# Altium PCB SIC18102  V1 8电极6005_20180920.PcbDoc (part 1 of 3)
Units mm, origin at the board's own origin, x right, y up, seen from the top; angles counter-clockwise.
Board outline 116 x 63 mm, 2 copper layers (Top Layer, Bottom Layer); 179 components, 127 nets, 387 pads, 294 vias.
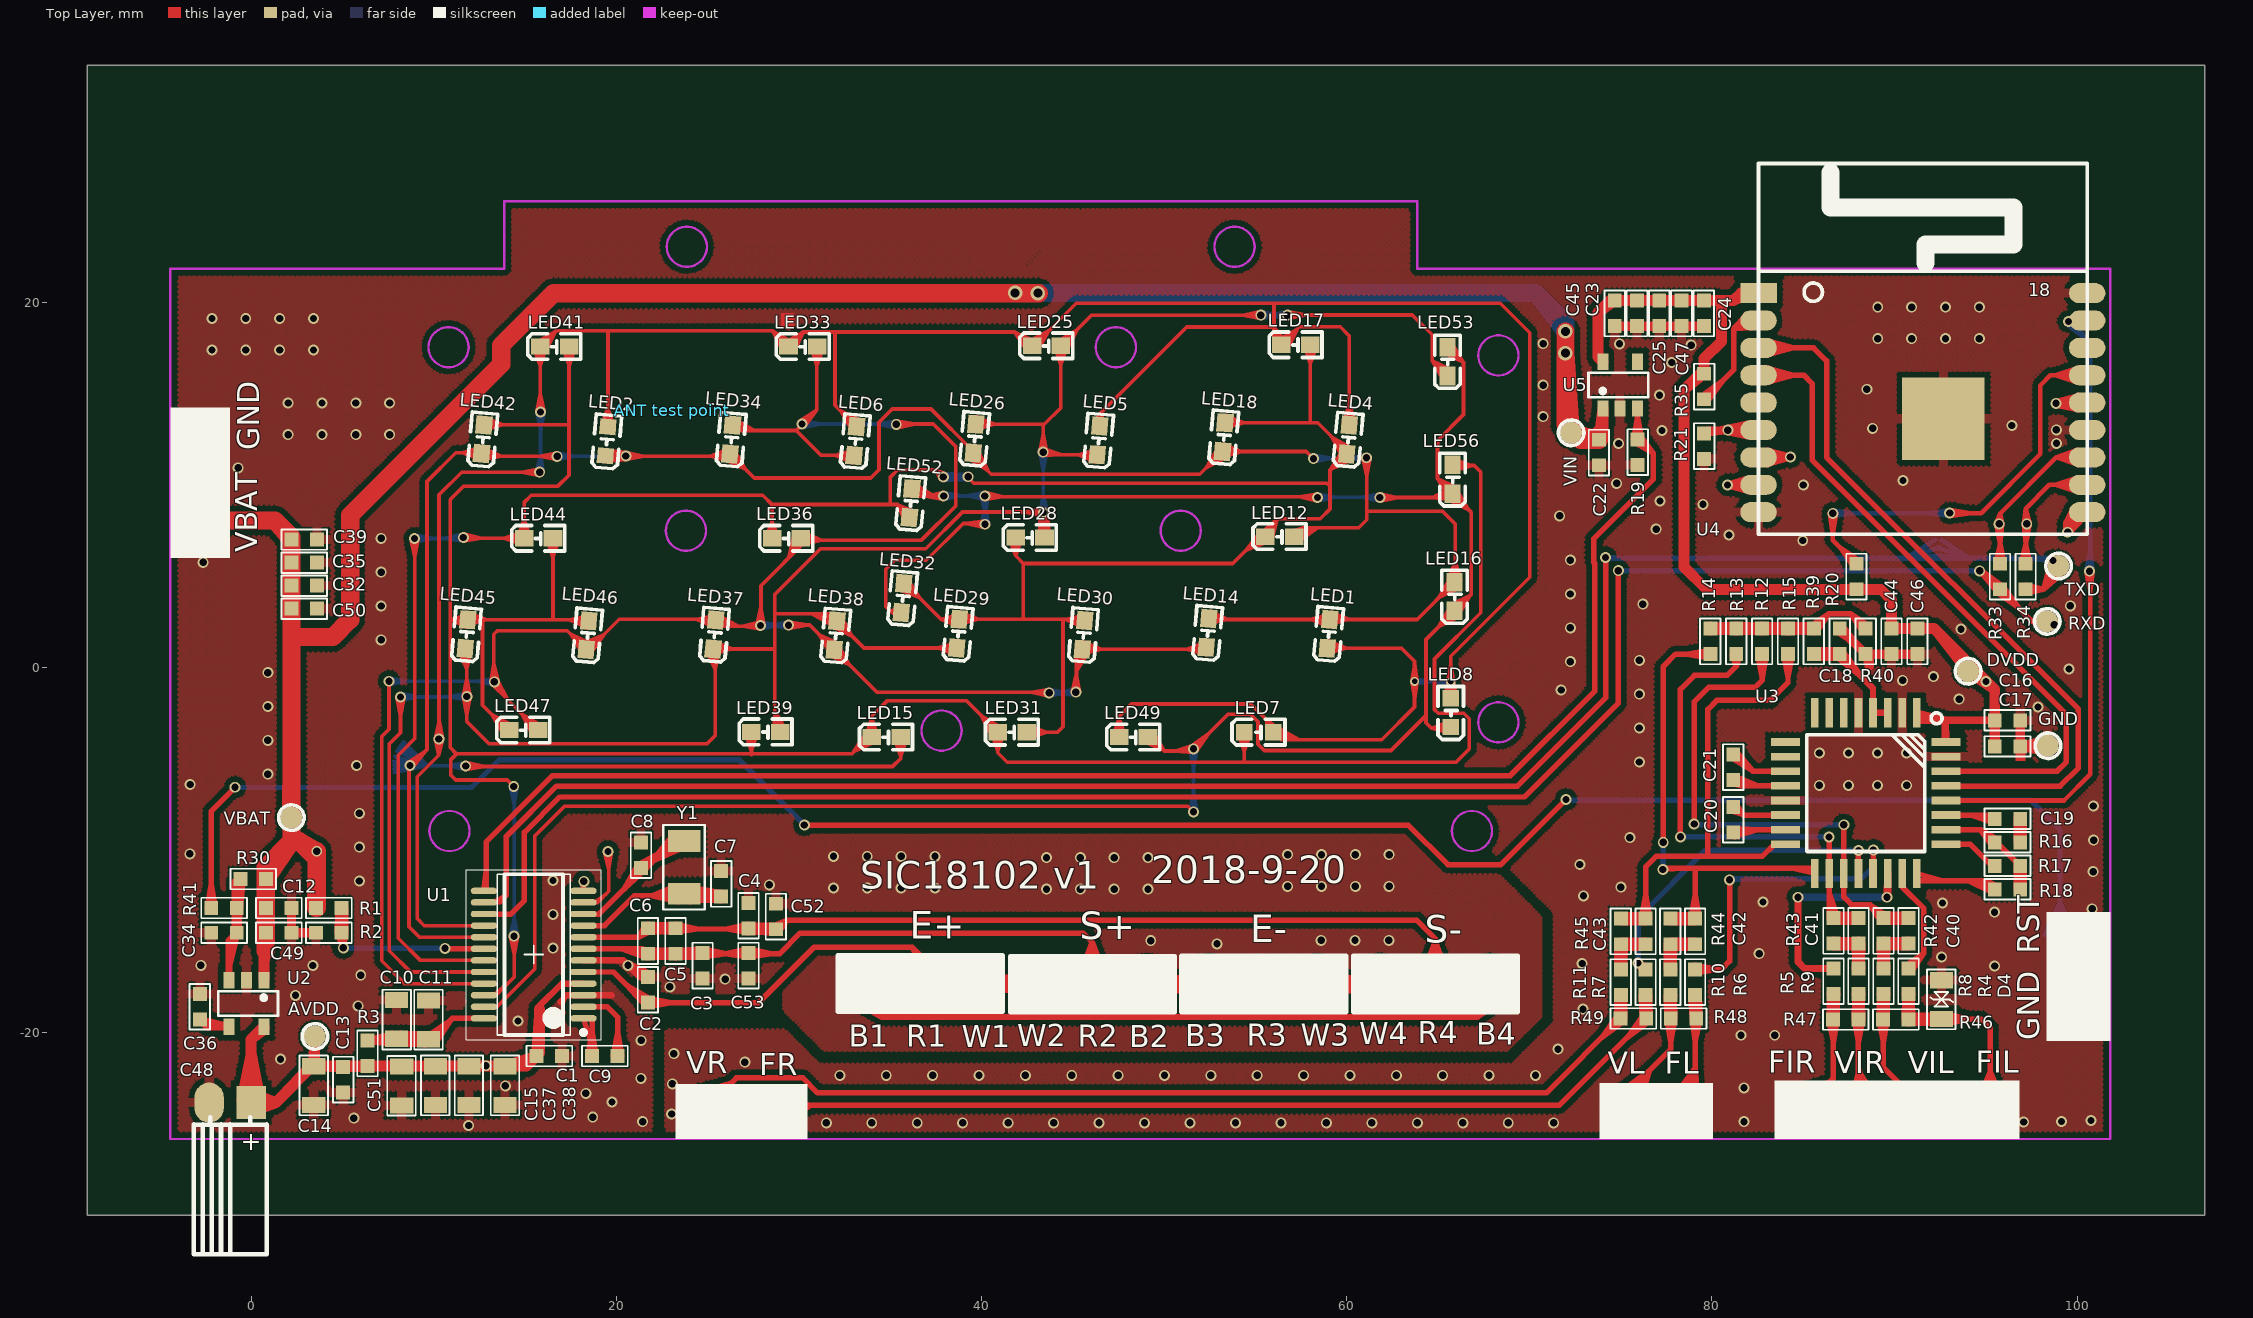
[diagram p0: Top Layer view]
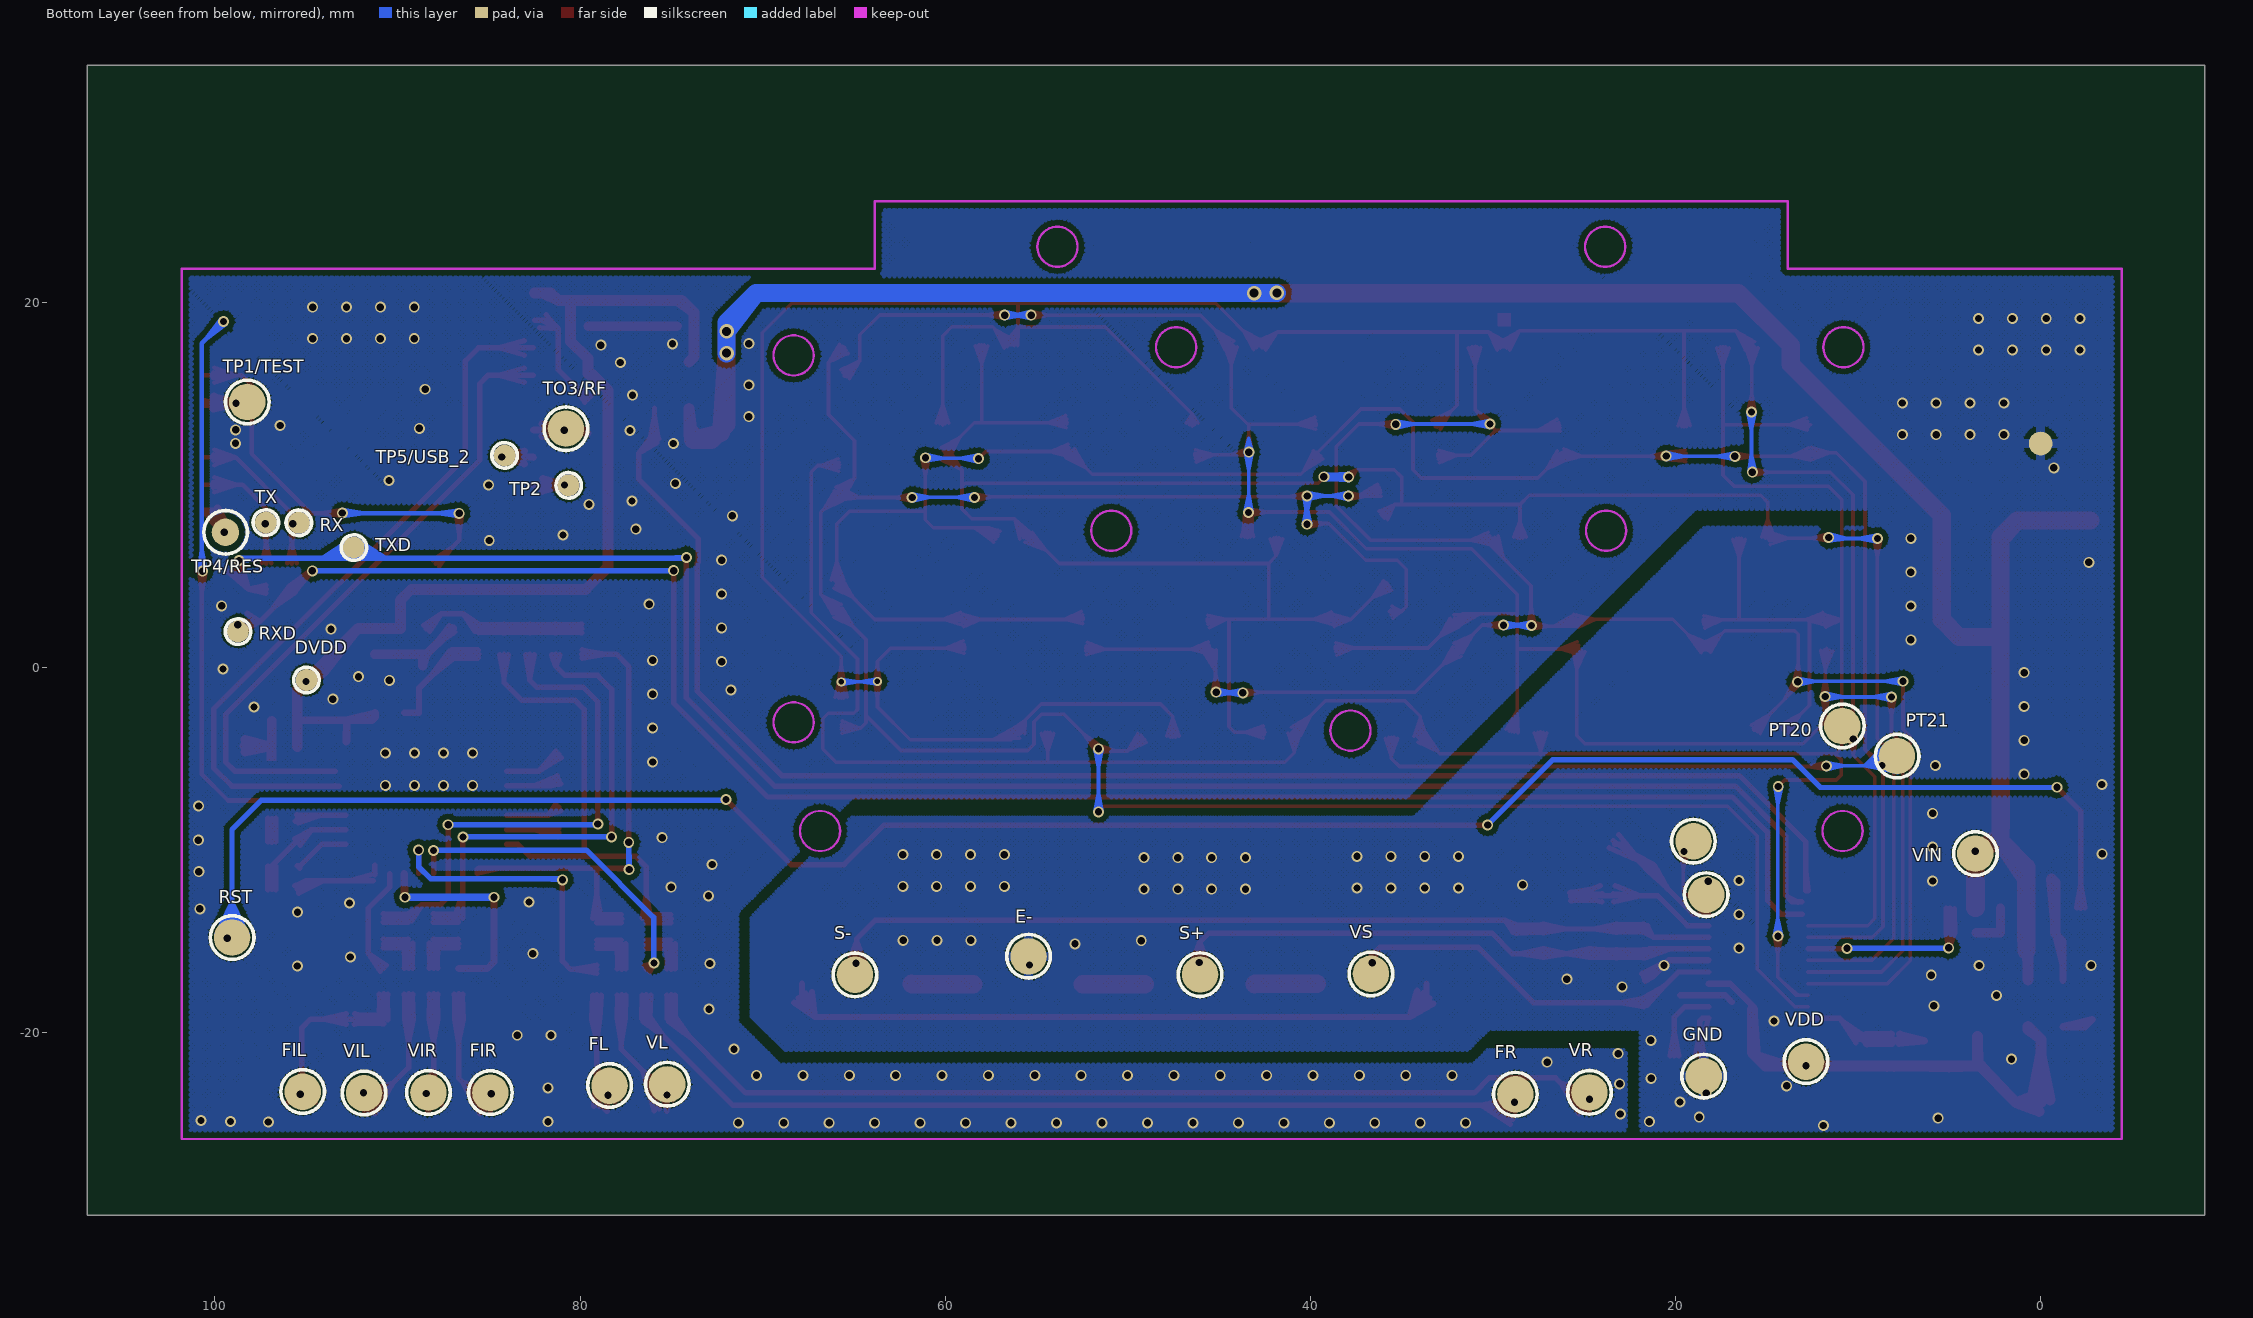
[diagram p1: Bottom Layer view, seen from below]

## Layer stack, top to bottom
Top Solder: solder mask 0.0102, Solder Resist, Dk 3.5
Top Layer: signal copper 0.0356
Dielectric1: core 0.32, FR-4, Dk 4.8
Bottom Layer: signal copper 0.0356
Bottom Solder: solder mask 0.0102, Solder Resist, Dk 3.5

## Board outline
-9,33 107,33 107,-30 -9,-30 -9,33

## Design rules (kind name [scope] priority, off if disabled: settings)
Clearance Clearance_1 [(InPolygon)] p1: gap=0.3 ignorepadtopadclearanceinfootprint=FALSE except(0: Arc-Hole Track-Hole SMDPad-Hole THPad-Hole Via-Hole Fill-Hole Poly-Hole Region-Hole Text-Hole)
Clearance [All] p2: gap=0.2 ignorepadtopadclearanceinfootprint=FALSE except(0: Arc-Hole Track-Hole SMDPad-Hole THPad-Hole Via-Hole Fill-Hole Poly-Hole Region-Hole Text-Hole)
ComponentClearance [All] p1: gap=0 collisioncheckmode=3 verticalgap=0.254 showdistances=FALSE
FabricationTestpoint [(IsPad And (OnTopLayer Or OnBottomLayer))] p1 off: side=3 testpointundercomponent=TRUE minsize=1.016 maxsize=2.54 preferedsize=1.524 minholesize=0 maxholesize=1.016 preferedholesize=0.813 testpointgrid=0.025 allowsidetop=TRUE allowsidebottom=TRUE usegrid=TRUE gridtolerance=0
PolygonConnect PolygonConnect_1 [IsVia] p1: connectstyle=Direct reliefconductorwidth=0.254 reliefentries=4 polygonreliefangle="90 Angle" airgapwidth=0.254
PolygonConnect [All] p2: connectstyle=Relief reliefconductorwidth=0.5 reliefentries=4 polygonreliefangle="90 Angle" airgapwidth=0.254
RoutingLayers [All] p1: top layer_v5=FALSE bottom layer_v5=FALSE
RoutingVias [All] p1: holewidth=0.711 width=1.27 viastyle="Through Hole" minholewidth=0.2 minwidth=0.3 maxholewidth=0.9 maxwidth=1.27
SilkToSolderMaskClearance SilkscreenOverComponentPads [IsPad] p1: minsilkscreentomaskgap=0.254 clearancetoexposedcopper=TRUE
SolderMaskExpansion [All] p1: expansion=0.102
Width [All] p1: maxlimit=2.54 minlimit=0.1 preferedwidth=0.5
26 further rules are at their usual default settings.

## Classes and differential pairs
component class M97_Flash_SCH: "ANT test point" C1 C2 C3 C4 C5 C6 C7 C8 C10 C11 C12 C13 C14 C15 C16 C17 C19 C21 C22 C23 C24 C25 C33 DGND GPIO4 "GPIO_5 WakeUP" H0 H1 ICE J2 L2 LED1 LED2 LED4 LED5 LED6 LED7 LED8 LED9 LED10 LED11 LED12 LED13 LED14 LED15 LED16 LED17 LED18 LED25 LED26 LED28 LED29 LED30 LED31 LED33 LED34 LED36 LED37 LED38 LED39 LED41 LED42 LED44 LED45 LED46 LED47 LED49 LED52 LED53 LED54 LED55 LED56 PT20 PT21 PT23 PT24 PT25 PT26 PT27 R1 R2 R3 RST SCAN U3 U4 VDD VPP0 Y1

## Components (designator, comment, footprint, x,y, rotation, side; value= is the part's Value field where it differs from the comment)
"ANT test point" "" TEST_POINT 23.044,14.08 r90 top
AVDD "" "TEST-SMD 1.2" 3.47,-20.2 r270 top
C1 "104" C0603E 15.625,-21.274 r0 top
C2 "105" C0603E 21.718,-16.946 r270 top
C3 "152" C0603E 24.714,-17.026 r90 top
C4 "152" C0603E 27.23,-12.893 r270 top
C5 "103" C0603E 23.23,-14.279 r270 top
C6 "152" C0603E 21.718,-14.279 r270 top
C7 "25P" C0603E 25.73,-11.15 r270 top
C8 "25P" C0603E 21.34,-9.58 r270 top
C9 "105" C0603E 18.664,-21.274 r0 top
C10 "106" C0805E 7.95,-18.202 r270 top
C11 "106" C0805E 9.71,-20.36 r90 top
C12 "105" C0603E 2.203,-13.172 r180 top
C13 "104" C0603E 5.03,-23.27 r90 top
C14 "106" C0805E 3.42,-23.963 r90 top
C15 "106" C0805E 10.08,-23.964 r90 top
C16 "106" C0603E 95.486,-2.892 r0 top
C17 "104" C0603E 96.883,-4.32 r180 top
C18 "105" C0603E 86.998,0.732 r90 top
C19 "105" C0603E 96.883,-8.284 r180 top
C20 "105" C0603E 81.166,-7.639 r270 top
C21 "104" C0603E 81.166,-4.754 r270 top
C22 "105" C0603E 73.805,11.079 r90 top
C23 "106" C0603E 75.893,18.696 r90 top
C24 "104" C0603E 79.553,18.696 r90 top
C25 "106" C0603E 77.113,20.093 r270 top
C32 "106" C0603E 3.592,4.485 r180 top
C34 "1.5nF" C0603E -2.196,-14.526 r0 top
C35 "152" C0603E 3.592,5.747 r180 top
C36 "NC" C0603E -2.82,-17.88 r270 top
C37 "106" C0805E 11.925,-23.964 r90 top
C38 "106" C0805E 13.898,-23.964 r90 top
C39 "104" C0603E 3.592,7.008 r180 top
C40 "473" C0603E 90.762,-13.725 r270 top
C41 "473" C0603E 88.023,-13.725 r270 top
C42 "473" C0603E 79.073,-13.756 r270 top
C43 "473" C0603E 76.362,-13.756 r270 top
C44 "106" C0603E 89.834,0.732 r90 top
C45 "106" C0603E 74.673,18.696 r90 top
C46 "106" C0603E 91.252,0.732 r90 top
C47 "106" C0603E 78.333,18.696 r90 top
C48 "NC" "C 4X7" -1.16,-23.83 r0 top
C49 "152" C0603E 2.203,-14.526 r180 top
C50 "NC" C0603E 3.592,3.224 r180 top
C51 "106" C0805E 8.234,-23.983 r90 top
C52 "104" C0603E 28.729,-14.335 r90 top
C53 "104" C0603E 27.23,-15.629 r270 top
D4 "NC" TVS0805 92.57,-19.25 r90 top
DVDD "" "TEST-SMD 1.2" 94.97,-0.68 r90 bottom
DVDD "" "TEST-SMD 1.2" 94.02,-0.2 r270 top
E- "" TEST-SMD#1 55.43,-15.82 r180 bottom
FIL "" TEST-SMD#1 95.19,-23.23 r180 bottom
FIL "" TEST-SMD#2 95.24,-24.304 r0 top
FIR "" TEST-SMD#1 84.91,-23.29 r180 bottom
FIR "" TEST-SMD#2 84.91,-24.304 r0 top
FL "" TEST-SMD#1 78.38,-22.9 r180 bottom
FL "" TEST-SMD#2 78.508,-24.304 r0 top
FR "" TEST-SMD#1 28.77,-23.376 r180 bottom
FR "" TEST-SMD#2 28.77,-24.304 r0 top
GND "" TEST-SMD#1 18.45,-22.38 r90 bottom
GND "" "TEST-SMD 1.2" 98.39,-4.28 r270 top
GND "" TEST-SMD#2 -2.71,12.61 r90 top
GND "" TEST-SMD#2 100.13,-18.96 r90 top
LED1 "LED5" LED0603#1 59.068,2.636 r265 top
LED2 "LED2" LED0603#2 19.53,13.18 r265 top
LED4 "LED2" LED0603#1 60.138,13.276 r265 top
LED5 "LED2" LED0603#1 46.47,13.23 r265 top
LED6 "LED2" LED0603#1 33.148,13.196 r265 top
LED7 "LED2" LED0603#3 55.97,-3.54 r180 top
LED8 "LED2" LED0603#2 65.695,-1.68 r270 top
LED12 "LED2" LED0603#1 57.12,7.17 r180 top
LED14 "LED2" LED0603#1 52.44,2.69 r265 top
LED15 "LED2" LED0603#1 35.562,-3.81 r180 top
LED16 "LED4" LED0603#1 65.899,4.684 r270 top
LED17 "LED2" LED0603#1 58,17.68 r180 top
LED18 "LED2" LED0603#1 53.328,13.406 r265 top
LED25 "LED2" LED0603#1 44.34,17.62 r180 top
LED26 "LED2" LED0603#1 39.678,13.326 r265 top
LED28 "LED2" LED0603#1 43.442,7.12 r180 top
LED29 "LED6" LED0603#1 38.778,2.646 r265 top
LED30 "LED2" LED0603#1 45.64,2.58 r265 top
LED31 "LED2" LED0603#1 42.462,-3.54 r180 top
LED32 "LED2" LED0603#1 35.738,4.596 r265 top
LED33 "LED2" LED0603#1 31.002,17.58 r180 top
LED34 "LED2" LED0603#1 26.35,13.28 r265 top
LED36 "LED2" LED0603#1 30.1,7.08 r180 top
LED37 "LED2" LED0603#1 25.428,2.596 r265 top
LED38 "LED2" LED0603#1 32.07,2.55 r265 top
LED39 "LED2" LED0603#1 28.972,-3.524 r180 top
LED41 "LED2" LED0603#1 17.4,17.58 r180 top
LED42 "LED2" LED0603#1 12.74,13.29 r265 top
LED44 "LED2" LED0603#1 16.52,7.08 r180 top
LED45 "LED6" LED0603#1 11.848,2.616 r265 top
LED46 "LED2" LED0603#1 18.48,2.56 r265 top
LED47 "LED2" LED0603#1 15.702,-3.42 r180 top
LED49 "LED2" LED0603#1 49.11,-3.81 r180 top
LED52 "LED2" LED0603#1 36.178,9.796 r265 top
LED53 "LED6" LED0603#1 65.51,17.552 r270 top
LED56 "LED2" LED0603#1 65.79,11.1 r270 top
PT20 "" TEST-SMD#1 10.87,-3.2 r270 bottom
PT21 "" TEST-SMD#1 7.87,-4.85 r270 bottom
R1 "1M" R0603E 4.947,-13.172 r180 top
R2 "1M" R0603E 3.55,-14.526 r0 top
R3 "NC" R0603E 6.36,-20.433 r270 top
R4 "330R" R0603E 90.762,-16.481 r270 top
R5 "330R" R0603E 86.654,-16.481 r270 top
R6 "330R" R0603E 79.073,-16.527 r270 top
R7 "330R" R0603E 76.362,-16.527 r270 top
R8 "330R" R0603E 89.393,-16.481 r270 top
R9 "330R" R0603E 88.023,-16.481 r270 top
R10 "330R" R0603E 77.718,-16.527 r270 top
R11 "330R" R0603E 75.007,-17.924 r90 top
R12 "1M" R0603E 82.744,0.732 r90 top
R13 "1M" R0603E 81.327,0.732 r90 top
R14 "1M" R0603E 79.909,0.732 r90 top
R15 "1M" R0603E 84.162,0.732 r90 top
R16 "1K" R0603E 95.486,-9.571 r0 top
R17 "300R" R0603E 96.883,-10.858 r180 top
R18 "1K" R0603E 95.486,-12.145 r0 top
R19 "100K" R0603E 75.93,11.103 r90 top
R20 "10K" R0603E 87.91,5.683 r270 top
R21 "10K" R0603E 79.57,11.433 r90 top
R30 "100K" R0603E 0.801,-11.58 r180 top
R33 "0R" R0603E 95.778,5.683 r270 top
R34 "0R" R0603E 97.175,4.286 r90 top
R35 "1K" R0603E 79.57,16.09 r270 top
R39 "10K" R0603E 85.58,0.732 r90 top
R40 "10K" R0603E 88.416,2.129 r270 top
R41 "2K" R0603E -2.196,-13.172 r0 top
R42 "10M" R0603E 89.393,-15.122 r90 top
R43 "10M" R0603E 86.654,-15.122 r90 top
R44 "10M" R0603E 77.718,-15.153 r90 top
R45 "10M" R0603E 75.007,-15.153 r90 top
R46 "NC" R0603E 89.372,-19.275 r0 top
R47 "NC" R0603E 88.026,-19.275 r180 top
R48 "NC" R0603E 77.743,-19.219 r0 top
R49 "NC" R0603E 75,-19.219 r0 top
RST "" TEST-SMD#1 99.06,-14.79 r270 bottom
RST "" TEST-SMD#2 100.13,-14.86 r270 top
RX "" "TEST-SMD 1.2" 95.39,7.93 r90 bottom
RXD "" "TEST-SMD 1.2" 98.74,1.97 r270 bottom
RXD "" "TEST-SMD 1.2" 98.35,2.53 r270 top
S+ "" TEST-SMD#1 46.04,-16.81 r0 bottom
S- "" TEST-SMD#1 64.94,-16.82 r0 bottom
TO3/RF "" TEST-SMD#1 80.77,13.09 r0 bottom
TP1/TEST "" TEST-SMD#1 98.23,14.55 r270 bottom
TP2 "" "TEST-SMD 1.2" 80.63,9.98 r270 bottom
TP4/RES "" TEST-SMD#3 99.42,7.41 r270 bottom
TP5/USB_2 "" "TEST-SMD 1.2" 84.13,11.61 r180 bottom
TX "" "TEST-SMD 1.2" 97.2,7.94 r90 bottom
TXD "" "TEST-SMD 1.2" 92.39,6.57 r270 bottom
TXD "" "TEST-SMD 1.2" 98.97,5.56 r270 top
U1 "CSU18MB86-24" SSOP-24P 18.19,-19.215 r90 top
U2 "HT7233" SOT-23-5 0.68,-17.12 r270 top
U3 "CS1258" LQFP32 91.22,-2.48 r270 top locked
U4 "CSM64F02" ESP-WROOM-02 100.55,7.31 r0 top locked
U5 "RT9013" SOT-23-5 74.02,14.19 r90 top
VBAT "" "TEST-SMD 1.2" 2.18,-8.22 r270 top
VBAT "" TEST-SMD#2 -2.71,8.058 r90 top
VDD "" TEST-SMD#1 12.85,-21.59 r180 bottom
VIL "" TEST-SMD#1 91.83,-23.31 r180 bottom
VIL "" TEST-SMD#2 91.797,-24.304 r0 top
VIN "" TEST-SMD#1 3.58,-10.19 r270 bottom
VIN "" "TEST-SMD 1.2" 72.28,12.86 r270 top
VIR "" TEST-SMD#1 88.3,-23.28 r180 bottom
VIR "" TEST-SMD#2 88.353,-24.304 r0 top
VL "" TEST-SMD#1 75.22,-22.83 r180 bottom
VL "" TEST-SMD#2 75.256,-24.304 r0 top
VR "" TEST-SMD#1 24.71,-23.274 r180 bottom
VR "" TEST-SMD#2 24.73,-24.304 r0 top
VS "" TEST-SMD#1 36.68,-16.77 r0 bottom
Y1 "32.768KHz" 3215(32.768) 23.71,-10.94 r90 top
? "" TEST-SMD#1 18.31,-12.44 r90 bottom
? "" TEST-SMD#1 19.01,-9.51 r90 bottom
? "" SENSOR 39.638,-17.314 r180 top
? "" SENSOR 43.059,-17.34 r0 top
? "" SENSOR 61.84,-17.314 r0 top
? "" SENSOR 58.459,-17.34 r180 top

## Footprints (in the part's own frame and the unit in brackets; to place one, negate y for a bottom-side part, rotate by r counter-clockwise, add the part's x,y. Pads: shape width x height; smd on the part's side, far side on the other; paste and mask are expansions set on the pad)
3215(32.768) [mm]
  rect 1.2x1.8 smd: 1(1.45,0) 2(-1.45,0)
  silkscreen extent -2.31,-1.13 2.32,1.15
C0603E [mil]
  rect 30x30 smd: 1(0,0) 2(55,0)
  silkscreen extent -22,-22 77,22
C0805E [mil]
  rect 35x50 smd: 1(0,0) 2(83.78,0)
  silkscreen extent -22,-30 107,31
"C 4X7" [mm]
  rect 1.6x1.8 smd: 1(1.15,0)
  oval 1.6x2.2 smd: 2(-1.15,0)
  silkscreen extent -2,-8.3 2,-0.8
ESP-WROOM-02 [mm]
  rect 4.5x4.5 smd: 0(-7.88,6.32)
  rect 2x1.1 smd: 1(-18,13.2)
  oval 2x1.1 smd: 2(-18,11.7) 3(-18,10.2) 4(-18,8.7) 5(-18,7.2) 6(-18,5.7) 7(-18,4.2) 8(-18,2.7) 9(-18,1.2) 10(0,1.2) 11(0,2.7) 12(0,4.2) 13(0,5.7) 14(0,7.2) 15(0,8.7) 16(0,10.2) 17(0,11.7) 18(0,13.2)
  silkscreen extent -18,0 0,20.3
LED0603#1 [mil]
  rect 40x35 smd: A(0,0) K(62.27,0)
  silkscreen extent -25,-28 89,27
LED0603#2 [mil]
  rect 34.65x35 smd: A(0,0) K(62.27,0)
  silkscreen extent -25,-28 89,27
LED0603#3 [mil]
  rect 35.43x35 smd: A(0,0) K(62.27,0)
  silkscreen extent -25,-28 89,27
LQFP32 [mm]
  rect 1.6x0.42 smd: 1(0,0) 2(0,-0.8) 3(0,-1.6) 4(0,-2.4) 5(0,-3.2) 6(0,-4) 7(0,-4.8) 8(0,-5.6) 17(8.8,-5.6) 18(8.8,-4.8) 19(8.8,-4) 20(8.8,-3.2) 21(8.8,-2.4) 22(8.8,-1.6) 23(8.8,-0.8) 24(8.8,0)
  rect 0.42x1.6 smd: 9(1.6,-7.2) 10(2.4,-7.2) 11(3.2,-7.2) 12(4,-7.2) 13(4.8,-7.2) 14(5.6,-7.2) 15(6.4,-7.2) 16(7.2,-7.2) 25(7.2,1.6) 26(6.4,1.6) 27(5.6,1.6) 28(4.8,1.6) 29(4,1.6) 30(3.2,1.6) 31(2.4,1.6) 32(1.6,1.6)
  silkscreen extent 0,-6.03 7.59,1.38
R0603E [mil]
  rect 30x30 smd: 1(0,0) 2(55,0)
  silkscreen extent -22,-22 77,22
SENSOR [mm]
  oval 1.5x2.8 smd: 1(0,0) 2(3,0) 3(6,0)
  silkscreen extent -1.5,-1.55 7.52,1.52
SOT-23-5 [mm]
  rect 0.9x0.6 smd: 1(0,0) 2(0,-0.95) 3(0,-1.9) 4(2.55,-1.9) 5(2.55,0)
  silkscreen extent 0.61,-2.49 1.95,0.78
SSOP-24P [mm]
  oval 0.35x1.45 smd: 1(0,0) 2(0.635,0) 3(1.27,0) 4(1.905,0) 5(2.54,0) 6(3.175,0) 7(3.81,0) 8(4.445,0) 9(5.08,0) 10(5.715,0) 11(6.35,0) 12(6.985,0) 13(6.985,5.45) 14(6.35,5.45) 15(5.715,5.45) 16(5.08,5.45) 17(4.445,5.45) 18(3.81,5.45) 19(3.175,5.45) 20(2.54,5.45) 21(1.905,5.45) 22(1.27,5.45) 23(0.635,5.45) 24(0,5.45)
  silkscreen extent -1.16,-0.98 8.14,6.43
TEST-SMD#1 [mm]
  round 2 smd: 1(0,0)
  silkscreen extent -1.19,-1.18 1.19,1.2
TEST-SMD#2 [mm]
  oval 1.8x2.5 smd: 1(0,0)
  silkscreen extent -1.19,-1.18 1.19,1.2
TEST-SMD#3 [mm]
  round 1.5 smd: 1(0,0)
  silkscreen extent -1.19,-1.18 1.19,1.2
"TEST-SMD 1.2" [mm]
  round 1.2 smd: 1(0,0)
  silkscreen extent -0.7,-0.69 0.7,0.71
TEST_POINT [mm]
TVS0805 [mil]
  rect 35x50 smd: 1(0,0) 2(83.78,0)
  silkscreen extent -22,-30 107,31

## Part data
C34 C36: library part CAP
R30 R41: library part Res1, "Resistor"
U2: library part RT9013

## Free pads (board coordinates)
  round 1.3 smd far side: 17(0,12.27)

## Via types
v1: diameter 0.6, hole 0.4, Top Layer to Bottom Layer, 288 vias
v2: diameter 0.8, hole 0.5, Top Layer to Bottom Layer, 4 vias
v3: diameter 0.5, hole 0.3, Top Layer to Bottom Layer, 2 vias

## Nets (pads, with @x,y where several pads share a name; then routed paths per layer and width w, separated by ;. In a path a pad name is that pad's centre, name@x,y a point inside that pad or via, vN(x,y) a via of type N, cw(c..) or ccw(c..) an arc to the next point about the centre after c; other vN are vias at no path point)
1256CS: 
1256SCK: 
AIN0: U3.6
AIN1: U3.7
AIN2: U3.8
AIN3: U3.9
AIN4: U3.10
ATN: R1.1 R2.2 U1.18 | length 40.1
  Top Layer w0.3: R2.2@4.717,-14.545 R1.1@4.729,-13.256 ; R2.2@4.717,-14.505 R1.1@4.949,-13.244 ; R2.2@4.718,-14.5 R1.1@4.98,-13.245 ; R1.1@4.718,-13.199 R2.2@4.98,-14.454 ; R2.2@4.724,-14.467 R1.1@5.166,-13.258 ; R1.1@4.947,-13.172 R2.2@4.98,-14.454 ; 4.98,-14.044 v1(5.04,-15.35) ; R1.1@4.98,-13.172 v1@4.98,-15.24 ; v1@5.12,-15.38 v1@4.98,-15.24 ; R2.2@5.17,-14.467 R1.1@4.729,-13.256 ; R2.2@5.177,-14.545 R1.1@5.166,-13.258 ; R2.2@5.178,-14.511 R1.1@4.98,-13.245 ; R2.2@5.177,-14.506 R1.1@4.949,-13.244 ; R1.1@5.178,-13.187 R2.2@4.98,-14.454 ; 11.115,-15.405 U1.18@12.19,-15.405 ; 11.912,-15.405 v1(10.61,-15.38) 10.635,-15.405 U1.18@12.74,-15.405 ; R1.1@4.729,-13.256 R2.2@4.947,-14.526 ; R2.2@4.947,-14.526 R1.1@4.98,-13.245 ; R2.2@4.947,-14.526 v1@4.98,-15.24 ; R2.2@4.947,-14.526 R1.1@5.166,-13.258 ; R2.2@4.947,-14.526 R1.1@4.949,-13.244 ; R2.2@4.947,-14.526 v1(5.04,-15.35) ; v1@4.98,-15.24 5.176,-14.553 v1(5.04,-15.35) ; v1@4.98,-15.24 4.721,-14.574 v1(5.04,-15.35)
  Bottom Layer w0.3: v1(5.04,-15.35) 6.343,-15.38 ; v1@5.05,-15.38 v1(10.61,-15.38) 9.308,-15.38
bat+: 
BAT-1: 
BAT-2: 
CAP0: 
CAP1: 
CHPV: 
CHPV1: 
CLK: 
CS1258_CS: U3.28 U4.17 | length 44.3
  Top Layer w0.25: U3.28@92.82,-7.28 99.28,-7.28 100.71,-5.85 v1@100.71,5.25 ; U3.28@93.41,-7.28 94.37,-7.28 ; v1@100.506,5.262 100.71,4.127 ; v1(100.68,5.28) 100.71,4.127 ; v1@100.855,5.271 100.71,4.127
  Bottom Layer w0.25: v1@99.415,18.818 100.462,18.018 v1@99.662,19.065 ; v1(99.53,18.95) 100.71,17.77 v1@100.71,5.28 ; v1@100.506,5.298 100.71,6.433 ; v1(100.68,5.28) 100.71,6.433 ; v1@100.855,5.289 100.71,6.433
CS1258_SCL: U3.29 U4.3 | length 44.8
  Top Layer w0.3: U4.3@82.55,17.51 85.57,17.51 86.28,16.8 86.28,11.51 100.07,-2.28 100.07,-5.49 99.07,-6.49 U3.29@93.18,-6.49 ; U4.3@83,17.51 84.45,17.51 ; U4.3@83.055,17.114 84.45,17.51 ; U4.3@83.055,17.906 84.45,17.51 ; U3.29@93.41,-6.48 94.52,-6.49
CS1258_SDA: U3.30 U4.4 | length 41.3
  Top Layer w0.3: U4.4@82.55,16.01 85.03,16.01 85.49,15.55 85.49,11.36 99.41,-2.56 99.41,-5.17 98.9,-5.68 U3.30@93.44,-5.68 ; U4.4@83,16.01 84.45,16.01 ; U4.4@83.055,15.614 84.45,16.01 ; U4.4@83.055,16.406 84.45,16.01 ; U3.30@93.41,-5.68 94.52,-5.68
DVDD: C16.1 C17.2 C23.2 C24.2 C25.1 C44.2 C45.2 C46.2 C47.2 DVDD.1 R20.2 R35.1 U3.1 U3.32 U4.1 U5.5 | length 79.2
  Top Layer w0.4: U3.32@92.76,-4.02 U3.32@92.82,-4.08 ; 92.977,-2.892 U3.1@91.22,-2.48 91.22,-2.73 91.382,-2.892 C16.1@95.486,-2.892 93.905,-2.892 ; U3.32@92.82,-4.08 92.77,-4.03 92.77,-2.892 U3.32@92.82,-4.08
  Top Layer w0.6: U5.5@74.02,16.74 73.76,17 73.76,19.45 ; U4.1@82.1,20.51 81.183,20.093 ; U4.1@82.48,20.51 81.6,20.51 81.183,20.093 ; 92.393,1.887 DVDD.1@94.02,-0.2 ; 93.352,0.928 v1(95.01,-0.76) ; C17.2@95.486,-4.32 95.486,-1.206 ; 73.76,19.45 74.403,20.093 C45.2@74.673,20.093 ; 73.76,19.45 C45.2@74.673,20.093 ; C45.2@74.673,20.093 80.46,20.093 ; 78.46,15.21 79.34,16.09 R35.1@79.57,16.09 ; 78.46,15.21 78.46,5.51 79.684,4.286 86.86,4.286 ; 78.46,15.21 R35.1@79.57,16.09 ; R35.1@79.57,16.09 79.57,16.92 80.514,17.864 80.514,20.039 80.46,20.093 ; 80.46,20.093 81.183,20.093 ; 86.86,4.286 R20.2@87.91,4.286 ; 86.86,4.286 89.244,4.286 89.834,3.696 C44.2@89.834,2.129 ; 86.86,4.286 R20.2@87.91,4.286 ; 86.86,4.286 R20.2@87.91,4.286 ; C44.2@89.834,2.129 C46.2@91.252,2.129 ; C44.2@89.834,2.129 C46.2@91.252,2.129 ; C46.2@91.252,2.129 92.151,2.129 95.486,-1.206 ; DVDD.1@94.02,-0.2 95.486,-1.206 ; DVDD.1@94.02,-0.2 v1(95.01,-0.76) ; v1(95.01,-0.76) 95.486,-1.206 ; v1(95.01,-0.76) 95.486,-1.206
F1L: 
FOL: 
GND: ?.2@55.459,-17.34 C1.2 C2.1 C3.1 C4.1 C7.1 C8.1 C10.1 C11.2 C12.1 C13.1 C14.1 C15.1 C16.2 C17.1 C18.2 C22.1 C23.1 C24.1 C25.2 C32.1 C34.1 C35.1 C36.1 C37.1 C38.1 C39.1 C44.1 C45.1 C46.1 C47.1 C48.2 C49.1 C50.1 C51.1 C52.2 C53.2 D4.2 E-.1 GND.1 pad.17 R2.1 R19.1 R21.1 R40.2 U1.3 U1.6 U2.2 U3.2 U3.5 U3.13 U3.31 U4.0 U4.9 U4.13 U4.18 U5.2 | length 69.4
  Top Layer w0.3: C18.2@86.856,1.947 88.044,1.161 ; C18.2@86.998,2.129 88.044,1.161 ; C18.2@87.168,2.285 88.044,1.161 ; C18.2@87.235,1.78 R40.2@88.046,0.969 ; C18.2@87.285,1.92 R40.2@88.096,1.109
  Top Layer w0.35: 16.91,-18.32 17.28,-17.948 ; U1.3@17.64,-17.945 17.28,-17.948 ; U1.6@18.19,-16.04 20.37,-16.04 21.25,-16.92 ; U1.3@18.74,-17.945 19.74,-17.94 17.28,-17.948 ; U1.6@18.74,-16.04 19.965,-16.04 ; C2.1@21.64,-16.92 21.25,-16.92 ; 20.413,-16.083 21.594,-17.11 v1(20.63,-16.31) ; 20.413,-16.083 21.82,-16.767 v1(20.63,-16.31) ; 20.413,-16.083 C2.1@21.718,-16.946 ; v1(20.63,-16.31) 21.25,-16.92 ; v1(20.63,-16.31) C2.1@21.718,-16.946 ; 21.25,-16.92 21.662,-17.144 21.25,-16.92 ; 21.25,-16.92 21.684,-16.743 21.25,-16.92 ; 21.25,-16.92 C2.1@21.718,-16.946 ; 21.25,-16.92 C2.1@21.718,-16.946
  Top Layer w0.5: 75.232,18.696 C25.2@77.113,18.696 ; C23.1@75.893,18.696 C45.1@74.673,18.696 C47.1@78.333,18.696 ; R40.2@88.445,0.695 C18.2@86.998,2.129 R40.2@88.416,0.732 ; 89.371,0.732 C46.1@91.252,0.732 ; C44.1@89.834,0.732 R40.2@88.416,0.732 ; C46.1@91.17,0.732 R40.2@88.416,0.732 ; GND.1@97.89,-4.28 97.85,-4.32 C17.1@96.883,-4.32 ; GND.1@98.34,-3.934 C17.1@96.883,-4.32 ; GND.1@98.359,-4.629 C17.1@96.883,-4.32 ; GND.1@98.39,-4.28 C17.1@96.883,-4.32 ; C49.1@2.203,-14.526 C12.1@2.203,-13.172 C49.1@2.203,-14.526 ; C49.1@2.203,-14.526 R2.1@3.55,-14.526 C49.1@2.203,-14.526 ; C47.1@78.333,18.696 C24.1@79.553,18.696 C47.1@78.333,18.696 ; R40.2@88.416,0.732 88.61,0.08 88.61,0.53 87.036,2.104 R40.2@88.416,0.732 ; C17.1@96.883,-4.32 C16.2@96.883,-2.892 ; C17.1@96.883,-4.32 C16.2@96.883,-2.892 ; C17.1@96.883,-4.32 C16.2@96.883,-2.892 ; C17.1@96.883,-4.32 C16.2@96.883,-2.892
  other v1: 11.9,-25.08 31.49,-24.937 33.98,-24.937 36.47,-24.937 38.96,-24.937 41.45,-24.937 43.94,-24.937 46.43,-24.937 48.92,-24.937 51.41,-24.937 53.9,-24.937 56.39,-24.937 58.88,-24.937 61.37,-24.937 63.86,-24.937 66.35,-24.937 68.84,-24.937 71.33,-24.937 81.757,-24.872 97.07,-24.89 21.43,-24.87 99.14,-24.86 100.754,-24.812 5.61,-24.68 18.698,-24.628 23.02,-24.45 19.755,-23.796 18.32,-23.32 81.757,-23.019 13.913,-22.907 23.06,-22.8 21.33,-22.5 32.233,-22.338 34.773,-22.338 37.313,-22.338 39.852,-22.338 42.392,-22.338 44.932,-22.338 47.472,-22.338 50.012,-22.338 52.552,-22.338 55.092,-22.338 57.632,-22.338 60.172,-22.338 62.712,-22.338 65.252,-22.338 67.792,-22.338 70.331,-22.338 27.03,-21.61 1.6,-21.45 23.14,-21.15 71.57,-20.9 21.35,-20.42 81.583,-20.14 83.437,-20.14 14.6,-19.36 72.94,-18.71 5.85,-18.53 2.42,-17.95 22.92,-17.49 25.95,-17.07 5.99,-16.85 95.48,-16.35 3.37,-16.32 -2.77,-16.31 55.38,-16.29 72.89,-16.21 92.58,-15.85 82.58,-15.67 16.52,-15.37 52.89,-15.13 49.26,-14.96 58.593,-14.94 60.447,-14.94 62.3,-14.94 16.52,-13.517 95.47,-13.4 100.819,-13.217 92.62,-12.9 82.79,-12.84 72.964,-12.505 43.547,-12.14 45.401,-12.14 47.254,-12.14 49.107,-12.14 31.88,-12.07 33.733,-12.07 35.587,-12.07 37.44,-12.07 75.01,-12.03 56.76,-11.98 58.613,-11.98 60.467,-11.98 62.32,-11.98 28.37,-11.9 5.912,-11.694 16.52,-11.663 100.879,-11.177 72.76,-10.79 43.547,-10.41 45.401,-10.41 47.254,-10.41 49.107,-10.41 31.88,-10.34 33.733,-10.34 35.587,-10.34 37.44,-10.34 56.76,-10.25 58.613,-10.25 60.467,-10.25 62.32,-10.25 -3.37,-10.2 5.912,-9.841 100.906,-9.454 75.5,-9.32 5.912,-7.987 100.89,-7.58 85.88,-6.45 87.473,-6.45 89.067,-6.45 90.66,-6.45 -3.35,-6.41 0.9,-5.84 5.77,-5.36 76.023,-5.168 85.88,-4.68 87.473,-4.68 89.067,-4.68 90.66,-4.68 0.9,-3.987 76.023,-3.314 97.86,-2.16 0.9,-2.133 93.54,-1.73 76.023,-1.461 71.74,-1.23 90.44,-0.7 92.13,-0.5 0.9,-0.28 99.558,-0.079 72.244,0.325 76.023,0.392 7.11,1.52 93.64,2.1 72.244,2.179 7.11,3.373 99.63,3.38 76.21,3.47 72.244,4.032 7.11,5.227 -2.64,5.76 72.244,5.885 84.97,6.96 7.11,7.08 80.93,7.26 76.94,7.58 71.655,8.307 79.51,8.94 77.15,9.12 85.002,9.998 74.78,10.09 90.46,10.25 -0.72,10.94 74.89,12.27 98.87,12.28 2.014,12.757 3.867,12.757 5.72,12.757 7.574,12.757 77.26,12.98 98.86,13.02 88.8,13.1 96.42,13.26 70.75,13.74 2.014,14.487 3.867,14.487 5.72,14.487 7.574,14.487 77.12,14.92 88.478,15.243 70.75,15.47 77.79,16.71 -2.16,17.39 -0.307,17.39 1.547,17.39 3.4,17.39 78.86,17.66 70.75,17.74 74.93,17.73 89.079,18.01 90.933,18.01 92.786,18.01 94.639,18.01 -2.16,19.12 -0.307,19.12 1.547,19.12 3.4,19.12 89.079,19.74 90.933,19.74 92.786,19.74 94.639,19.74
GPIO_4: 
"GPIO_5 WakeUP": 
H0: 
H1: 
ICE: 
IS0: R4.1 U3.23 | length 8.4
  Top Layer w0.3: U3.23@90.42,-11.28 90.42,-12.01 91.6,-13.19 91.6,-15.643 ; R4.1@90.615,-16.303 91.6,-15.643 ; R4.1@90.762,-16.481 91.6,-15.643 ; R4.1@90.94,-16.628 91.6,-15.643
IS1: R5.1 U3.22 | length 16.2
  Top Layer w0.4: v1(84.71,-12.58) 84.71,-16.12 85.071,-16.481 R5.1@86.654,-16.481 ; v1(89.59,-12.58) v1@89.62,-12.55 ; v1(89.59,-12.58) 89.62,-11.87 v1@89.62,-12.55 ; v1(89.59,-12.58) U3.22@89.62,-11.28 v1@89.62,-12.55
  Bottom Layer w0.4: v1@84.65,-12.58 v1(89.59,-12.58) ; v1(84.71,-12.58) 86.312,-12.58
IS2: R6.1 U3.21 | length 24.5
  Top Layer w0.3: R6.1@79.073,-16.527 80.513,-16.527 80.96,-16.08 v1(80.96,-11.63) ; R6.1@79.094,-16.757 80.354,-16.527 R6.1@79.094,-16.297 ; U3.21@88.82,-11.28 88.82,-9.97 88.82,-10.69 v1(88.84,-10) U3.21@88.82,-11.28
  Bottom Layer w0.3: v1@80.84,-11.58 88.17,-11.58 88.84,-10.91 ; v1(80.96,-11.63) 82.264,-11.58 ; 88.84,-10.91 v1(88.84,-10) 88.84,-10.91
IS3: R7.1 U3.20 | length 25
  Top Layer w0.3: R7.1@76.179,-16.668 v1(75.95,-16.18) ; R7.1@76.47,-16.322 v1(75.95,-16.18) ; v1(75.95,-16.18) 76.09,-16.18 R7.1@76.362,-16.452 ; v1(75.95,-16.18) R7.1@76.362,-16.527 R7.1@76.362,-16.452 ; v1(75.95,-16.18) R7.1@76.362,-16.452 ; U3.20@88.02,-11.28 88.02,-10.1 88.02,-10.69 v1(88.02,-10.02) U3.20@88.02,-11.28
  Bottom Layer w0.3: v1(75.95,-16.18) 75.97,-14.878 ; v1@75.97,-16.08 75.97,-13.68 79.65,-10 88,-10 v1(88.02,-10.02) 86.718,-10
ISIN0: D4.1 FIL.1 R4.2 R46.2 | length 65.3
  Top Layer w0.3: R4.2@90.532,-17.899 90.762,-19.159 R4.2@90.992,-17.899 ; R46.2@90.539,-19.293 R4.2@90.552,-18.007 ; R46.2@90.539,-19.255 R4.2@90.762,-17.994 ; R46.2@90.545,-19.218 R4.2@90.973,-18.004 ; R46.2@90.746,-19.045 D4.1@92.044,-19.03 ; R46.2@90.753,-19.505 D4.1@92.046,-19.481 ; R4.2@90.762,-17.878 90.762,-19.268 R46.2@90.769,-19.275 ; R46.2@90.786,-19.045 D4.1@92.05,-19.256 ; R46.2@90.79,-19.505 92.05,-19.275 R46.2@90.79,-19.045 ; R46.2@90.793,-19.505 D4.1@92.05,-19.256 ; R46.2@90.826,-19.051 D4.1@92.046,-19.481 ; R46.2@90.833,-19.497 D4.1@92.044,-19.03 ; R46.2@90.992,-19.216 R4.2@90.552,-18.007 ; R46.2@90.999,-19.291 R4.2@90.973,-18.004 ; R46.2@90.999,-19.253 R4.2@90.762,-17.994 ; D4.1@92.342,-18.958 R46.2@91.035,-19.275 ; D4.1@92.353,-19.543 R46.2@91.035,-19.275 ; D4.1@92.38,-19.25 R46.2@91.035,-19.275 ; D4.1@92.761,-19.25 94.105,-19.25 ; D4.1@92.793,-19.543 94.105,-19.25 ; D4.1@92.793,-18.957 94.105,-19.25 ; FIL.1@94.506,-23.798 95.24,-22.154 ; 95.24,-22.061 v1(95.318,-23.369) ; R4.2@90.552,-18.007 R46.2@90.769,-19.275 ; R4.2@90.762,-17.994 R46.2@90.769,-19.275 ; R46.2@90.769,-19.275 92.545,-19.275 D4.1@92.57,-19.25 94.75,-19.25 95.24,-19.74 95.24,-24.024 v1(95.318,-23.369) ; R46.2@90.769,-19.275 R4.2@90.973,-18.004 ; R46.2@90.769,-19.275 D4.1@92.046,-19.481 ; R46.2@90.769,-19.275 D4.1@92.044,-19.03 ; R46.2@90.769,-19.275 D4.1@92.05,-19.256 ; 95.24,-22.154 95.974,-23.798 v1(95.318,-23.369) ; 95.24,-22.154 94.794,-23.898 v1(95.318,-23.369) ; 95.24,-22.154 95.686,-23.898 v1(95.318,-23.369) ; 95.24,-22.154 95.24,-23.954 v1(95.318,-23.369) ; 95.24,-22.154 v1(95.318,-23.369) ; 95.24,-22.154 v1(95.318,-23.369) ; 95.24,-22.154 v1(95.318,-23.369) ; 95.24,-22.154 v1(95.318,-23.369)
ISIN1: FIR.1 R5.2 R47.2 | length 37.6
  Top Layer w0.3: FIR.1@84.555,-23.293 86.429,-22.711 ; FIR.1@84.667,-23.575 86.429,-22.711 ; FIR.1@84.91,-24.304 84.91,-24.23 86.654,-22.486 R5.2@86.654,-17.878 ; FIR.1@84.91,-23.954 86.429,-22.711 ; FIR.1@85.233,-24.267 86.429,-22.711 ; FIR.1@85.487,-24.433 86.429,-22.711 ; 86.096,-22.815 v1(84.858,-23.339) 86.115,-22.865 ; R47.2@86.398,-19.288 R5.2@86.443,-18.001 ; R47.2@86.399,-19.3 86.654,-20.557 ; R47.2@86.399,-19.25 R5.2@86.654,-17.994 ; R47.2@86.406,-19.213 R5.2@86.864,-18.009 ; R5.2@86.424,-17.899 86.654,-19.159 R5.2@86.884,-17.899 ; R47.2@86.853,-19.221 R5.2@86.443,-18.001 ; R47.2@86.859,-19.297 R5.2@86.864,-18.009 ; R47.2@86.859,-19.291 86.654,-20.557 ; R47.2@86.859,-19.259 R5.2@86.654,-17.994 ; R5.2@86.443,-18.001 R47.2@86.629,-19.275 ; R47.2@86.629,-19.275 R5.2@86.864,-18.009 ; R47.2@86.629,-19.275 R5.2@86.654,-17.994 ; R47.2@86.629,-19.275 86.654,-20.557
ISIN2: FL.1 R6.2 R48.2 | length 40.1
  Top Layer w0.3: FL.1@78.09,-23.786 79.073,-21.95 ; FL.1@78.508,-24.304 FL.1@79.073,-23.739 ; R6.2@78.843,-17.945 79.073,-19.205 R6.2@79.303,-17.945 ; R48.2@78.909,-19.228 79.073,-20.505 ; R48.2@78.909,-19.21 R6.2@79.073,-17.935 ; R48.2@78.911,-19.251 R6.2@78.845,-17.958 ; R48.2@78.914,-19.169 R6.2@79.303,-17.945 ; FL.1@78.951,-24.029 79.073,-21.95 ; 78.955,-22.171 v1(78.468,-23.429) ; 79.006,-22.041 v1(78.468,-23.429) ; 79.007,-22.186 v1(78.468,-23.429) ; FL.1@79.073,-23.459 R6.2@79.073,-17.924 ; FL.1@79.254,-24.024 79.073,-21.95 ; R48.2@79.359,-19.147 R6.2@78.845,-17.958 ; R48.2@79.369,-19.252 79.073,-20.505 ; R48.2@79.369,-19.186 R6.2@79.073,-17.935 ; R48.2@79.371,-19.228 R6.2@79.303,-17.945 ; v1(78.468,-23.429) 78.508,-23.954 79.073,-21.95 ; v1(78.468,-23.429) 77.834,-23.624 79.073,-21.95 ; R6.2@78.845,-17.958 R48.2@79.14,-19.219 ; 79.073,-20.505 R48.2@79.14,-19.219 ; R6.2@79.073,-17.935 R48.2@79.14,-19.219 ; R48.2@79.14,-19.219 R6.2@79.303,-17.945
ISIN3: FR.1 R7.2 R49.2 | length 83.8
  Top Layer w0.3: FR.1@28.744,-23.855 30.634,-23.97 ; FR.1@28.787,-23.554 30.634,-23.97 ; FR.1@28.844,-23.95 28.864,-23.97 71.646,-23.97 R49.2@76.397,-19.219 ; FR.1@28.901,-24.734 30.634,-23.97 ; FR.1@29.046,-25.001 30.634,-23.97 ; 30.119,-23.939 v1(28.82,-23.81) ; 30.155,-23.97 v1(28.82,-23.81) ; 30.175,-23.867 v1(28.82,-23.81) ; R7.2@76.132,-17.945 R49.2@76.362,-19.185 ; R49.2@76.167,-19.246 R7.2@76.134,-17.956 ; R49.2@76.166,-19.205 R7.2@76.362,-17.937 ; R49.2@76.173,-19.164 R7.2@76.592,-17.947 ; R49.2@76.221,-19.069 75.379,-20.237 ; R7.2@76.362,-17.924 R49.2@76.362,-19.185 ; R49.2@76.547,-19.395 75.379,-20.237 ; R7.2@76.592,-17.945 R49.2@76.362,-19.185 ; R49.2@76.618,-19.152 R7.2@76.134,-17.956 ; R49.2@76.626,-19.192 R7.2@76.362,-17.937 ; R49.2@76.627,-19.234 R7.2@76.592,-17.947 ; FR.1@28.77,-24.304 28.844,-24.23 v1(28.82,-23.81) ; FR.1@28.77,-24.304 30.634,-23.97 ; FR.1@28.77,-24.304 v1(28.82,-23.81) ; 75.379,-20.237 R49.2@76.397,-19.219 ; R7.2@76.134,-17.956 R49.2@76.397,-19.219 ; R49.2@76.362,-19.185 R49.2@76.397,-19.219 ; R7.2@76.362,-17.937 R49.2@76.397,-19.219 ; R49.2@76.397,-19.219 R7.2@76.592,-17.947
lvd: 
MCU_IO2: 
MISO: 
MOSI: 
"NetANT test point_1": 
NetC9_1: C9.1 U1.1 | length 6.6
  Top Layer w0.3: C9.1@18.434,-21.253 18.664,-19.993 C9.1@18.894,-21.253 ; C9.1@18.664,-21.274 18.664,-19.354 18.525,-19.215 U1.1@18.19,-19.215 18.664,-20.689
NetC9_2: C9.2 U1.2 | length 7.6
  Top Layer w0.3: U1.2@18.19,-18.58 19.5,-18.58 ; U1.2@18.74,-18.58 19.5,-18.58 ; C9.2@19.831,-21.253 20.061,-19.993 C9.2@20.291,-21.253 ; C9.2@20.061,-21.274 20.061,-19.141 19.5,-18.58
NetC10_2: C10.2 C11.1 R3.1 U1.24 | length 38.4
  Top Layer w0.3: C11.1@9.71,-20.36 9.87,-20.36 11.015,-19.215 U1.24@12.74,-19.215 ; C11.1@9.711,-20.134 10.905,-19.325 ; C11.1@9.901,-20.36 10.905,-19.325 ; C11.1@10.132,-20.542 10.905,-19.325 ; 11.115,-19.215 U1.24@12.19,-19.215
  Top Layer w0.4: C10.2@7.72,-20.089 R3.1@6.36,-20.433 ; C10.2@7.756,-20.574 R3.1@6.36,-20.433 ; C10.2@7.759,-20.33 R3.1@6.36,-20.433 ; C11.1@9.45,-20.594 C10.2@8.177,-20.088 ; C11.1@9.461,-20.123 C10.2@8.144,-20.574 ; C11.1@9.491,-20.117 C10.2@7.872,-20.433 ; C11.1@9.493,-20.603 C10.2@8.14,-20.33 ; C11.1@9.503,-20.116 C10.2@8.14,-20.33 ; C11.1@9.512,-20.604 C10.2@7.872,-20.433 ; C11.1@9.536,-20.604 C10.2@8.144,-20.574 ; C11.1@9.546,-20.117 C10.2@8.177,-20.088 ; C11.1@9.71,-20.36 C11.1@9.637,-20.433 ; R3.1@6.36,-20.433 C11.1@9.637,-20.433 ; C10.2@7.872,-20.433 C11.1@9.52,-20.36 ; C10.2@8.14,-20.33 C11.1@9.637,-20.433 ; C10.2@8.14,-20.33 C11.1@9.52,-20.36 ; C10.2@8.144,-20.574 C11.1@9.637,-20.433 ; C10.2@8.144,-20.574 C11.1@9.52,-20.36 ; C10.2@8.177,-20.088 C11.1@9.637,-20.433 ; C10.2@8.177,-20.088 C11.1@9.52,-20.36
NetC12_1: 
NetC19_1: C19.1 R16.2 | length 15.4
  Top Layer w0.3: C19.1@96.653,-8.305 R16.2@96.883,-9.565 ; C19.1@96.653,-8.264 R16.2@96.653,-9.55 ; C19.1@96.661,-8.346 R16.2@97.113,-9.55 ; R16.2@96.883,-9.571 C19.1@96.883,-8.284 ; C19.1@97.106,-8.346 R16.2@96.653,-9.55 ; C19.1@97.113,-8.305 R16.2@96.883,-9.565 ; C19.1@97.113,-8.264 R16.2@97.113,-9.55 ; R16.2@96.653,-9.55 96.883,-8.29 R16.2@97.113,-9.55 ; R16.2@96.653,-9.55 C19.1@96.883,-8.284 ; R16.2@96.883,-9.565 C19.1@96.883,-8.284 ; C19.1@96.883,-8.284 R16.2@97.113,-9.55
NetC19_2: C19.2 U3.27 | length 8.3
  Top Layer w0.3: U3.27@92.82,-8.08 95.27,-8.08 C19.2@95.61,-8.42 ; U3.27@93.41,-8.08 94.52,-8.08 ; C19.2@95.356,-8.284 C19.2@95.486,-8.284 94.129,-8.08 ; C19.2@95.433,-8.509 94.129,-8.08 ; C19.2@95.501,-8.054 94.129,-8.08
NetC20_1: C20.1 U3.14 | length 6.2
  Top Layer w0.3: C20.1@81.055,-7.842 81.73,-8.08 ; C20.1@81.166,-7.639 81.73,-8.08 ; C20.1@81.27,-7.62 81.73,-8.08 ; C20.1@81.336,-7.483 81.73,-8.08 ; 82.32,-8.08 U3.14@83.43,-8.08 ; U3.14@84.02,-8.08 81.73,-8.08
NetC20_2: C20.2 U3.15 | length 7.8
  Top Layer w0.3: C20.2@81.159,-8.806 82.477,-8.88 ; C20.2@81.166,-9.036 82.477,-8.88 ; C20.2@81.214,-9.263 82.477,-8.88 ; C20.2@81.253,-8.88 U3.15@84.02,-8.88 ; 82.32,-8.88 U3.15@83.43,-8.88
NetC21_1: C21.1 U3.11 | length 8.3
  Top Layer w0.3: C21.1@81.031,-4.942 82.242,-5.672 ; C21.1@81.166,-4.754 82.242,-5.672 ; C21.1@81.33,-4.591 82.242,-5.672 ; C21.1@81.4,-4.83 82.25,-5.68 U3.11@84.02,-5.68 ; 82.32,-5.68 U3.11@83.43,-5.68
NetC21_2: C21.2 U3.12 | length 11.4
  Top Layer w0.3: C21.2@81.131,-6.38 82.542,-6.48 ; C21.2@81.238,-5.932 82.542,-6.48 ; C21.2@81.26,-6.17 81.57,-6.48 ; 82.32,-6.48 U3.12@83.43,-6.48 ; U3.12@84.02,-6.48 81.57,-6.48 ; C21.2@81.166,-6.151 81.57,-6.48 ; C21.2@81.166,-6.151 82.542,-6.48 ; C21.2@81.166,-6.151 81.57,-6.48 ; 81.57,-6.48 81.348,-6.009 81.57,-6.48 ; 81.57,-6.48 81.064,-6.358 81.57,-6.48
NetC34_2: C34.2 R30.2 R41.2 U2.3 | length 12.5
  Top Layer w0.4: U2.3@-1.22,-17.12 -1.22,-14.947 ; U2.3@-1.22,-16.97 -1.22,-15.47 ; -1.22,-16.25 C34.2@-0.799,-14.526 ; -1.22,-14.947 C34.2@-0.799,-14.526 ; -1.22,-14.947 C34.2@-0.799,-14.526 ; -1.22,-14.947 C34.2@-0.799,-14.526
  Top Layer w0.6: C34.2@-0.799,-14.526 -0.799,-11.783 R30.2@-0.596,-11.58 -0.799,-13.834
NetC36_2: C36.2 U2.4 | length 4
  Top Layer w0.4: C36.2@-2.82,-19.277 -2.427,-19.67 ; C36.2@-2.82,-19.277 U2.4@-1.22,-19.67 -2.427,-19.67 ; C36.2@-2.82,-19.277 -2.427,-19.67
NetC40_2: C40.2 R8.1 R42.1 | length 31
  Top Layer w0.3: R8.1@89.163,-16.46 89.393,-15.2 R8.1@89.623,-16.46 ; R42.1@89.163,-15.142 R8.1@89.393,-16.403 ; R42.1@89.162,-15.103 R8.1@89.176,-16.39 ; R42.1@89.169,-15.181 R8.1@89.61,-16.39 ; R8.1@89.393,-16.481 R42.1@89.393,-15.122 ; R42.1@89.414,-15.352 90.674,-15.122 R42.1@89.414,-14.892 ; R42.1@89.616,-15.181 R8.1@89.176,-16.39 ; R42.1@89.623,-15.142 R8.1@89.393,-16.403 ; R42.1@89.623,-15.103 R8.1@89.61,-16.39 ; C40.2@90.703,-15.345 R42.1@89.493,-14.906 ; C40.2@90.703,-14.898 R42.1@89.493,-15.337 ; C40.2@90.741,-15.352 R42.1@89.481,-15.122 ; C40.2@90.741,-14.892 R42.1@89.481,-15.122 ; C40.2@90.78,-15.352 R42.1@89.493,-15.337 ; C40.2@90.78,-14.891 R42.1@89.493,-14.906 ; R8.1@89.176,-16.39 R42.1@89.393,-15.122 ; R8.1@89.393,-16.403 R42.1@89.393,-15.122 ; R42.1@89.393,-15.122 C40.2@90.762,-15.122 ; R42.1@89.393,-15.122 R8.1@89.61,-16.39 ; R42.1@89.481,-15.122 C40.2@90.762,-15.122 ; R42.1@89.493,-15.337 C40.2@90.762,-15.122 ; R42.1@89.493,-14.906 C40.2@90.762,-15.122
NetC41_2: C41.2 R9.1 R43.1 | length 33.5
  Top Layer w0.3: R43.1@86.654,-15.122 C41.2@88.023,-15.122 ; R43.1@86.675,-15.352 87.935,-15.122 R43.1@86.675,-14.892 ; R9.1@87.793,-16.46 C41.2@88.023,-15.2 ; C41.2@87.793,-15.103 R9.1@87.806,-16.39 ; C41.2@87.8,-15.181 R9.1@88.241,-16.39 ; C41.2@87.965,-15.345 R43.1@86.755,-14.906 ; C41.2@87.965,-14.898 R43.1@86.755,-15.337 ; C41.2@88.003,-15.352 86.742,-15.122 C41.2@88.003,-14.892 ; C41.2@88.042,-15.352 R43.1@86.755,-15.337 ; C41.2@88.042,-14.891 R43.1@86.755,-14.906 ; C41.2@88.247,-15.181 R9.1@87.806,-16.39 ; R9.1@88.254,-16.46 C41.2@88.023,-15.2 ; C41.2@88.254,-15.103 R9.1@88.241,-16.39 ; R43.1@86.755,-15.337 C41.2@88.023,-15.122 ; R43.1@86.755,-14.906 C41.2@88.023,-15.122 ; R9.1@87.806,-16.39 C41.2@88.023,-15.122 ; R9.1@88.023,-16.403 88.254,-15.142 R9.1@88.023,-16.403 ; R9.1@88.023,-16.403 87.793,-15.142 R9.1@88.023,-16.403 ; R9.1@88.023,-16.403 C41.2@88.023,-15.122 ; C41.2@88.023,-15.2 R9.1@88.023,-16.481 C41.2@88.023,-15.122 ; C41.2@88.023,-15.122 R9.1@88.241,-16.39
NetC42_2: C42.2 R10.1 R44.1 | length 33.5
  Top Layer w0.3: R10.1@77.488,-16.506 R44.1@77.718,-15.246 ; R44.1@77.487,-15.135 R10.1@77.503,-16.422 ; R44.1@77.494,-15.212 R10.1@77.932,-16.422 ; R44.1@77.738,-15.383 78.999,-15.153 R44.1@77.738,-14.923 ; R44.1@77.941,-15.212 R10.1@77.503,-16.422 ; R10.1@77.948,-16.506 R44.1@77.718,-15.246 ; R44.1@77.948,-15.135 R10.1@77.932,-16.422 ; C42.2@79.014,-15.376 R44.1@77.805,-14.935 ; C42.2@79.014,-14.93 R44.1@77.805,-15.371 ; C42.2@79.052,-15.383 77.792,-15.153 C42.2@79.052,-14.923 ; C42.2@79.092,-15.383 R44.1@77.805,-15.371 ; C42.2@79.092,-14.923 R44.1@77.805,-14.935 ; R10.1@77.503,-16.422 R44.1@77.718,-15.153 ; R10.1@77.718,-16.434 77.948,-15.174 R10.1@77.718,-16.434 ; R10.1@77.718,-16.434 77.488,-15.174 R10.1@77.718,-16.434 ; R10.1@77.718,-16.434 R44.1@77.718,-15.153 ; R44.1@77.718,-15.246 R10.1@77.718,-16.527 R44.1@77.718,-15.153 ; R44.1@77.718,-15.153 C42.2@79.073,-15.153 ; R44.1@77.718,-15.153 R10.1@77.932,-16.422 ; R44.1@77.805,-15.371 C42.2@79.073,-15.153 ; R44.1@77.805,-14.935 C42.2@79.073,-15.153
NetC43_2: C43.2 R11.2 R45.1 | length 38.7
  Top Layer w0.3: R11.2@74.777,-16.506 R45.1@75.007,-15.246 ; R45.1@74.776,-15.135 R11.2@74.792,-16.422 ; R45.1@74.783,-15.212 R11.2@75.221,-16.422 ; R45.1@75.028,-15.383 C43.2@76.288,-15.153 ; R45.1@75.028,-14.923 C43.2@76.288,-15.153 ; R45.1@75.23,-15.212 R11.2@74.792,-16.422 ; R11.2@75.237,-16.506 R45.1@75.007,-15.246 ; R45.1@75.237,-15.135 R11.2@75.221,-16.422 ; C43.2@76.303,-15.376 R45.1@75.094,-14.935 ; C43.2@76.303,-14.93 R45.1@75.094,-15.371 ; C43.2@76.381,-15.383 R45.1@75.094,-15.371 ; C43.2@76.381,-14.923 R45.1@75.094,-14.935 ; R11.2@74.792,-16.422 R45.1@75.007,-15.153 ; R11.2@75.007,-16.434 75.237,-15.174 R11.2@75.007,-16.434 ; R11.2@75.007,-16.434 74.777,-15.174 R11.2@75.007,-16.434 ; R11.2@75.007,-16.434 R45.1@75.007,-15.153 ; R45.1@75.007,-15.246 R11.2@75.007,-16.527 R45.1@75.007,-15.153 ; R45.1@75.007,-15.153 C43.2@76.362,-15.153 ; R45.1@75.007,-15.153 R11.2@75.221,-16.422 ; R45.1@75.007,-15.153 C43.2@76.288,-15.153 ; R45.1@75.081,-15.153 76.341,-15.383 R45.1@75.081,-15.153 ; R45.1@75.081,-15.153 76.341,-14.923 R45.1@75.081,-15.153 ; R45.1@75.081,-15.153 C43.2@76.362,-15.153 ; R45.1@75.094,-15.371 C43.2@76.362,-15.153 ; R45.1@75.094,-14.935 C43.2@76.362,-15.153
NETFIL-0: 
NetLC1_1: ?.1@39.638,-17.314 ?.1@43.059,-17.34 | length 6.9
  Top Layer w1: ?.1@39.638,-17.314 43.033,-17.314 ?.1@43.059,-17.34 ?.1@39.638,-17.314
NetLC1_3: ?.3@33.638,-17.314 ?.3@67.84,-17.314 | length 51.2
  Top Layer w0.35: ?.3@33.263,-18.399 34.56,-19.14 ; ?.3@33.472,-18.116 34.56,-19.14 ; ?.3@33.638,-17.964 34.56,-19.14 ; ?.3@33.638,-17.314 33.638,-18.218 34.56,-19.14 ; ?.3@33.825,-17.839 34.56,-19.14 ; ?.3@34.151,-17.703 34.56,-19.14 ; ?.3@67.296,-17.777 67.13,-19.14 ; ?.3@67.639,-17.864 67.13,-19.14 ; ?.3@67.84,-17.964 67.13,-19.14 ; ?.3@67.84,-17.314 67.84,-18.43 67.13,-19.14 ; ?.3@68.022,-18.096 67.13,-19.14 ; ?.3@68.259,-18.358 67.13,-19.14 ; 34.56,-19.14 67.13,-19.14
NetLC2_3: ?.3@49.059,-17.34 ?.3@52.459,-17.34 | length 6.8
  Top Layer w1: ?.3@49.059,-17.34 ?.3@52.459,-17.34 ?.3@49.059,-17.34
NetLC3_1: ?.1@58.459,-17.34 ?.1@61.84,-17.314 | length 6.8
  Top Layer w1: ?.1@58.459,-17.34 61.815,-17.34 ?.1@61.84,-17.314 ?.1@58.459,-17.34
NetR10_1: 